# EAGLE board main_tugas terakhir (EAGLE 9.6.2)
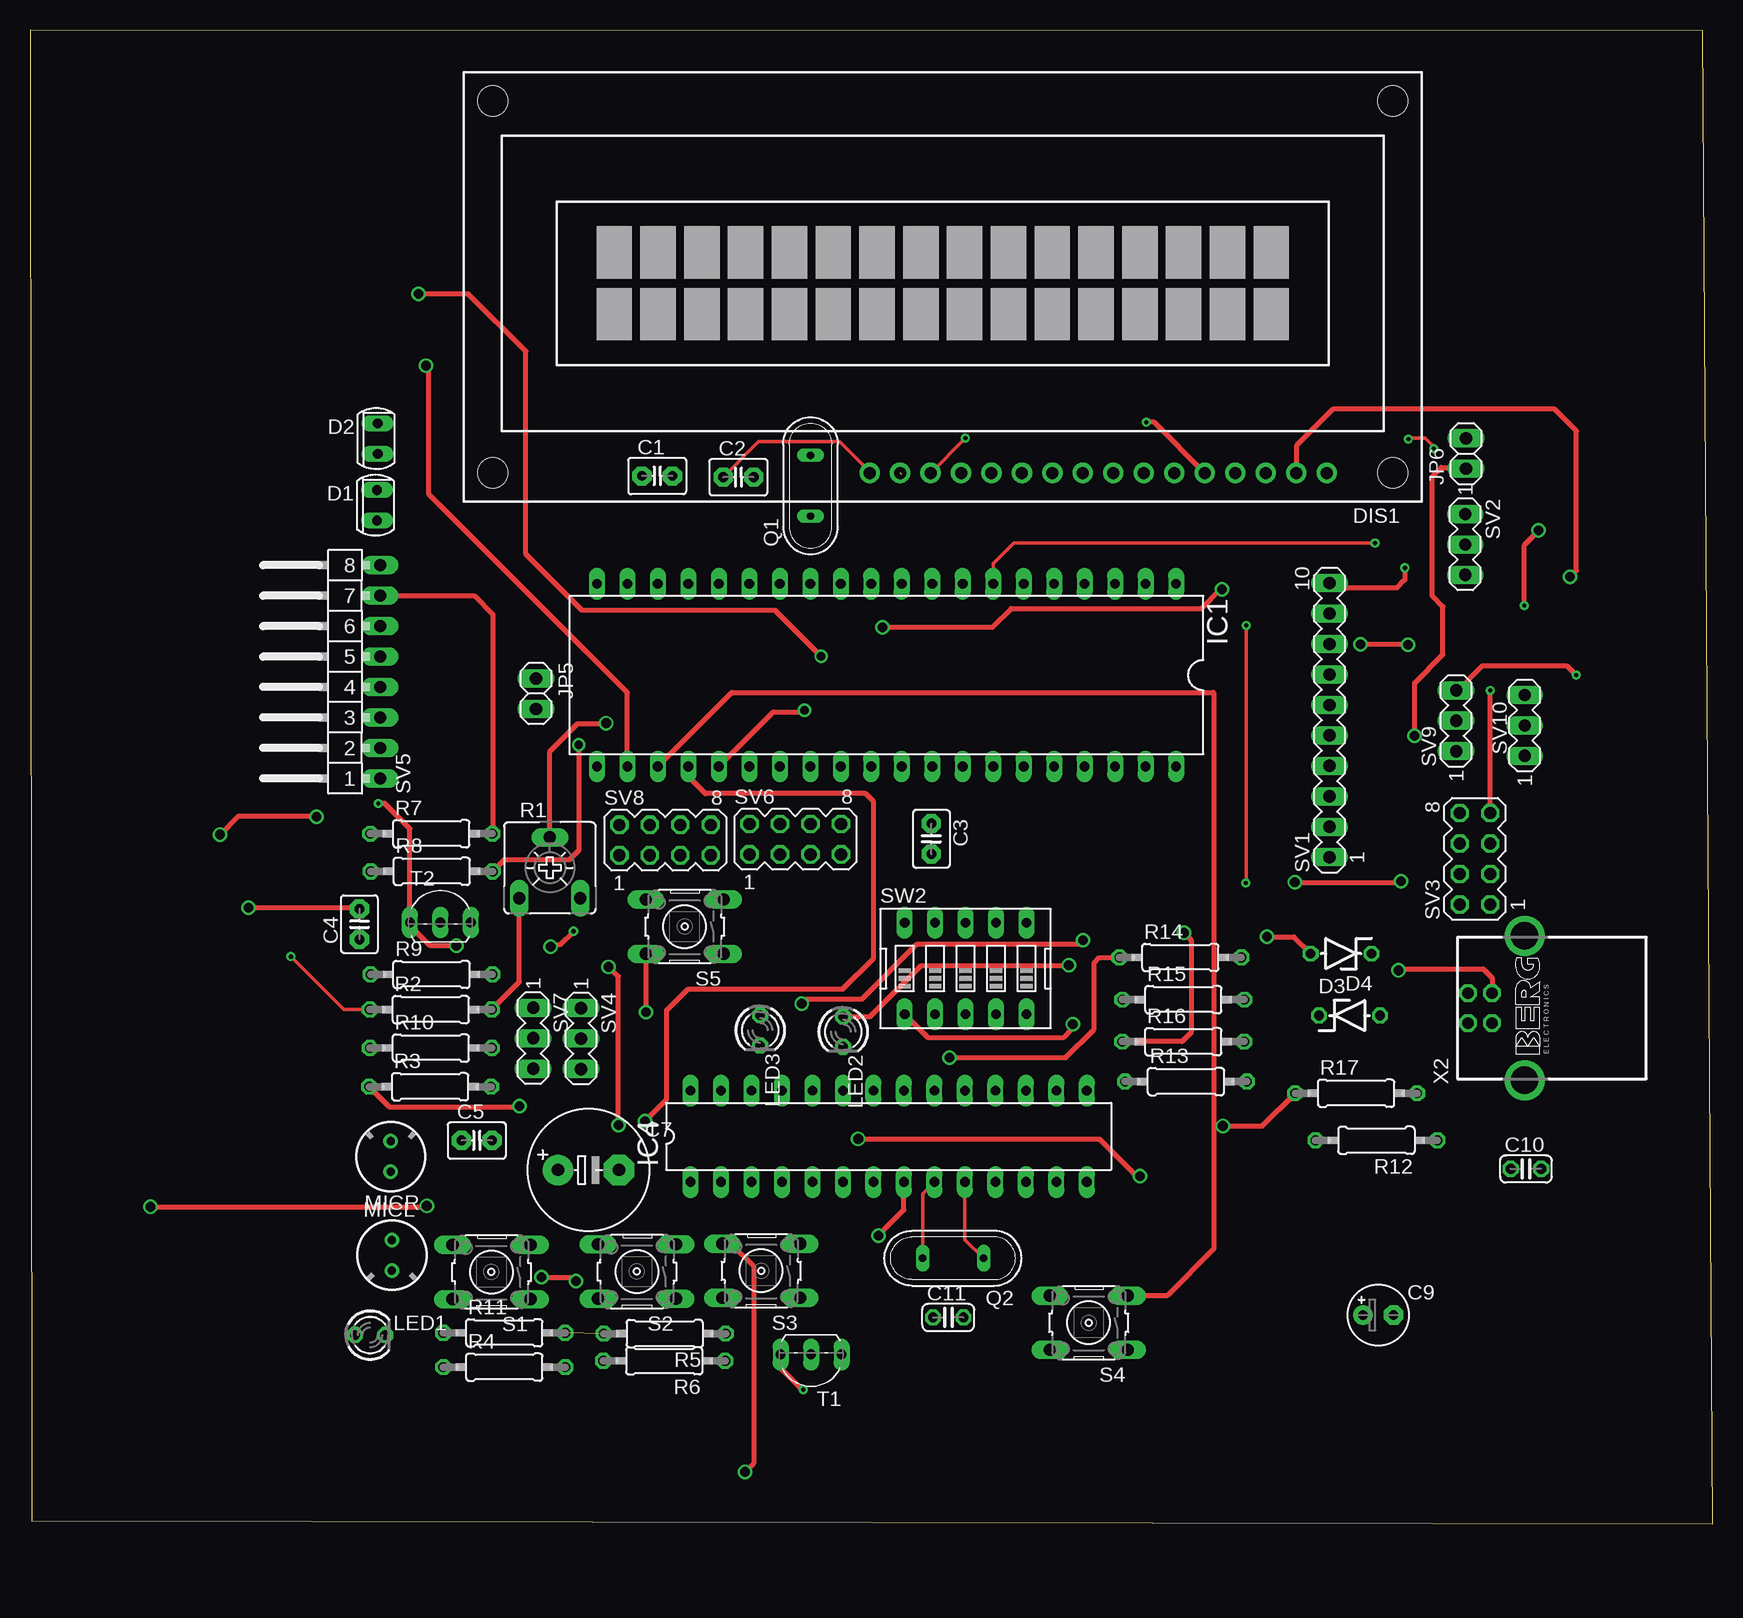
[diagram p0: board, top side]
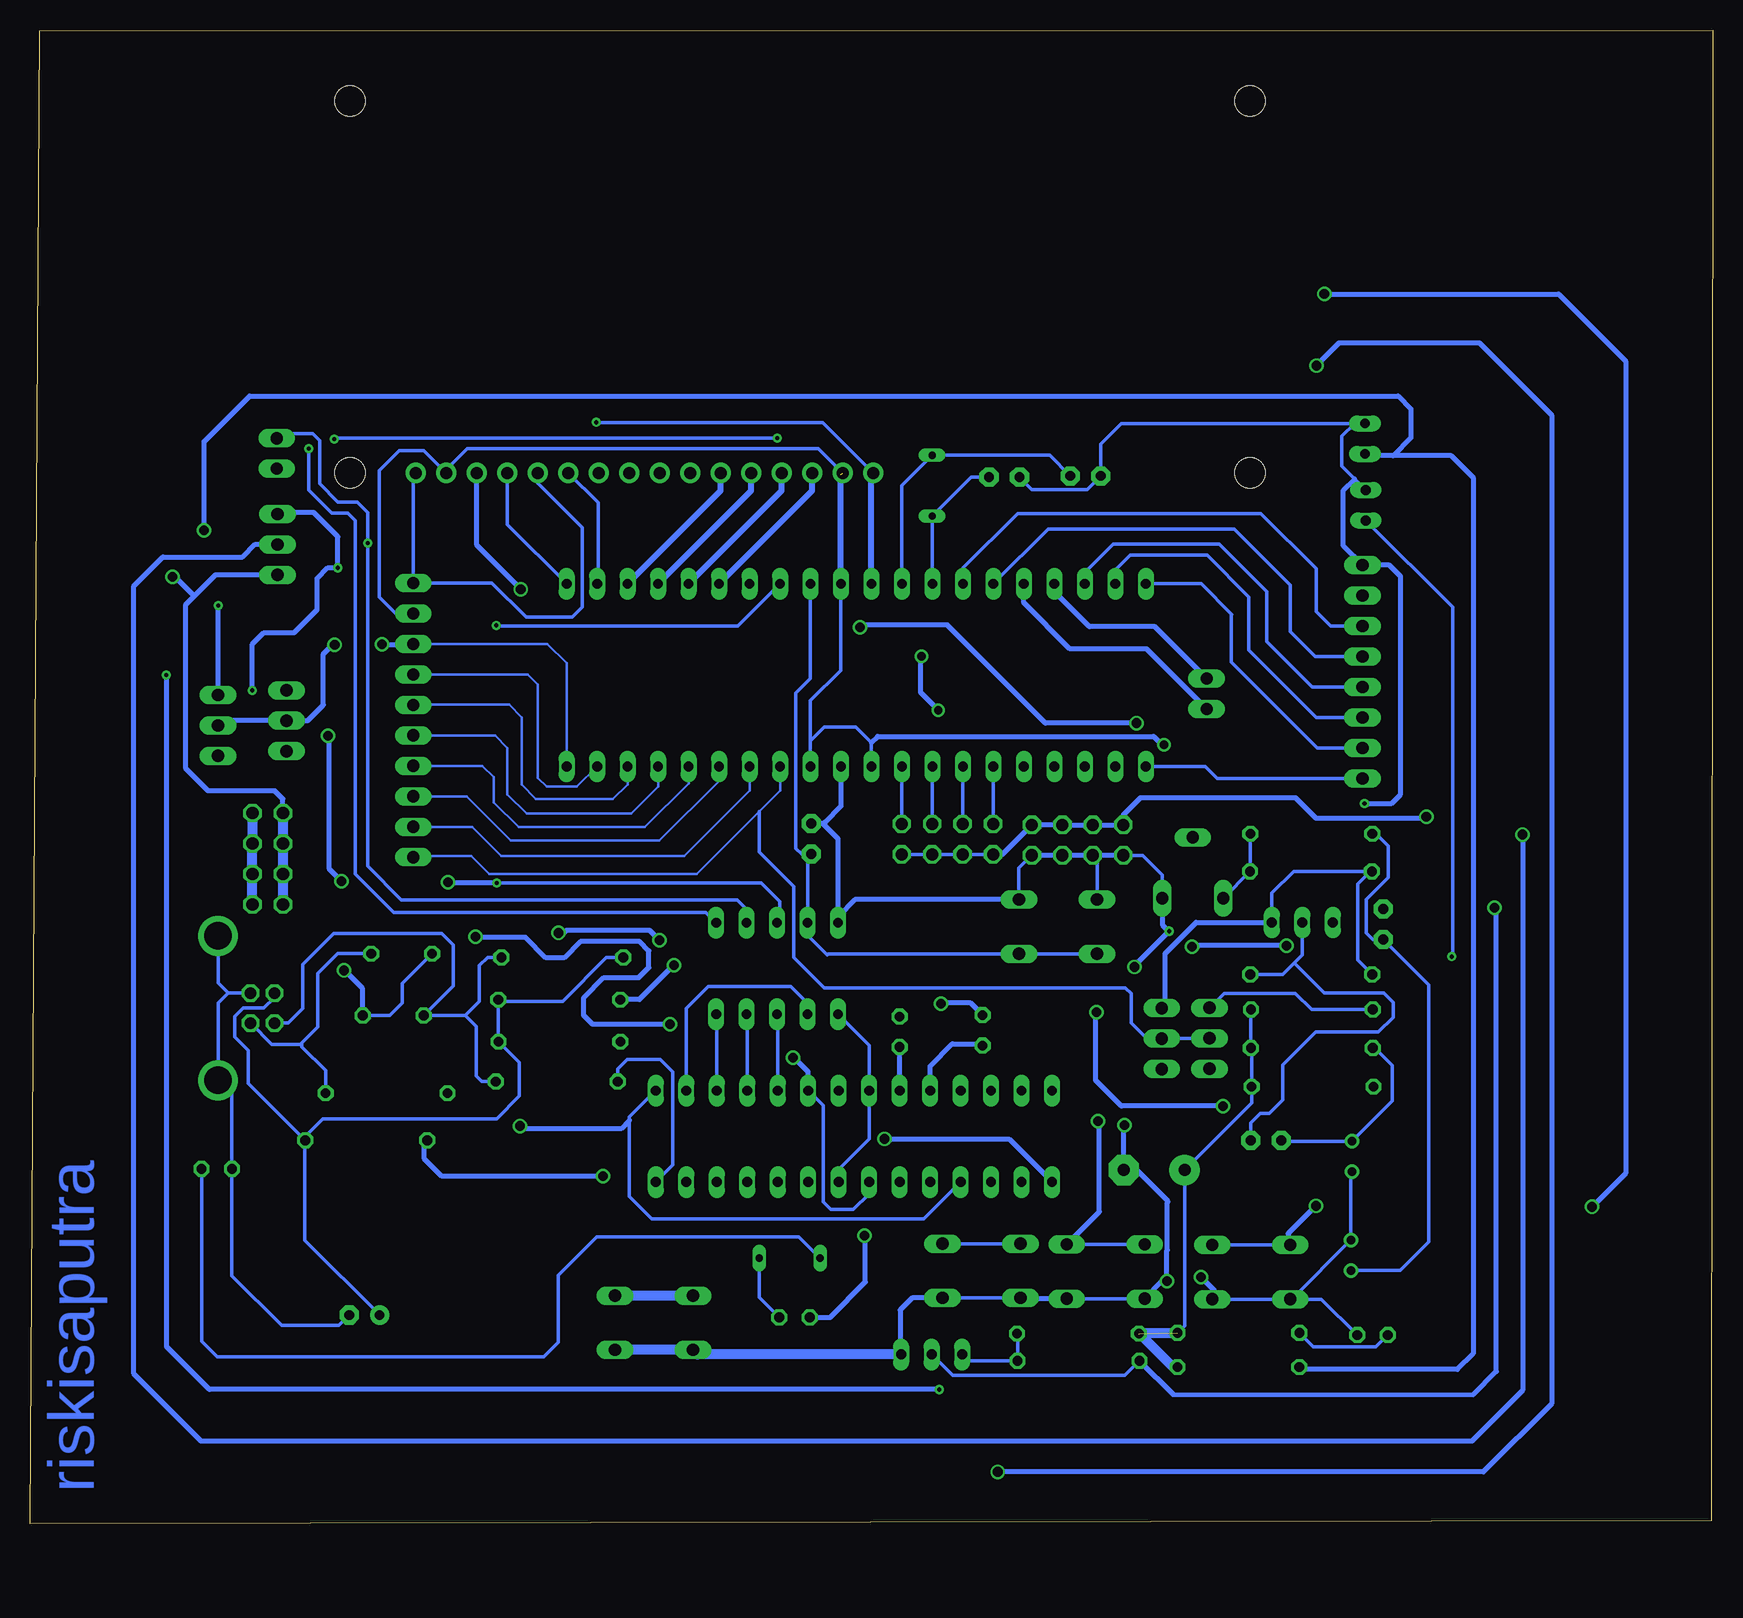
[diagram p1: board, bottom side, seen from below]

Size 140.22 x 124.52 mm. Coordinates in mm from the lower left corner, seen from the top.
Outline: 0.13,0.24 140.22,0 139.4,124.48 0,124.52 0.13,0.24
Copper layers (1*16): Top 0.035mm / dielectric 1.5mm / Bottom 0.035mm
Design rules "default": minimum track width 6mil, minimum drill 0.35mm, track to track 6mil, track to pad 6mil, pad to pad 6mil, via to via 6mil, smd to smd 6mil, copper to edge 40mil, drill to drill 6mil, minimum pad ring 10mil, minimum via ring 8mil, stop-mask expansion 4mil, vias tented up to drill 0mil, thermal gap 10mil

## Footprints (pad centres in the part's own frame; a part is rotated, then mirrored left to right if it is on the bottom)
C2.5-3 = drill 0.813 pad 1.6 octagon: 1 -1.27,0; 2 1.27,0
E5-10,5 = drill 1.016 pad 2.54: + -2.54,0 | drill 1.016 pad 2.54 octagon: - 2.54,0
E2,5-5 = drill 0.813 pad 1.6: + -1.27,0 | drill 0.813 pad 1.6 octagon: - 1.27,0
C025-024X044 = drill 0.813 octagon: 1 -1.27,0; 2 1.27,0
SFH225 = drill 0.813 long: A 0,1.27; K 0,-1.27
ZDIO-5 = drill 0.813 octagon: A 2.54,0; C -2.54,0
TUXGR_16X2_R2 = drill 1 pad 1.676: 1 -32,15.5; 2 -29.46,15.5; 3 -26.92,15.5; 4 -24.38,15.5; 5 -21.84,15.5; 6 -19.3,15.5; 7 -16.76,15.5; 8 -14.22,15.5; 9 -11.68,15.5; 10 -9.14,15.5; 11 -6.6,15.5; 12 -4.06,15.5; 13 -1.52,15.5; 14 1.02,15.5; 15 3.56,15.5; 16 6.1,15.5 | hole 2.5: -37.5,-15.5; 37.5,-15.5; -37.5,15.5; 37.5,15.5
DIL40 = drill 0.813 long: 1 -24.13,-7.62; 2 -21.59,-7.62; 3 -19.05,-7.62; 4 -16.51,-7.62; 5 -13.97,-7.62; 6 -11.43,-7.62; 7 -8.89,-7.62; 8 -6.35,-7.62; 9 -3.81,-7.62; 10 -1.27,-7.62; 11 1.27,-7.62; 12 3.81,-7.62; 13 6.35,-7.62; 14 8.89,-7.62; 15 11.43,-7.62; 16 13.97,-7.62; 17 16.51,-7.62; 18 19.05,-7.62; 19 21.59,-7.62; 20 24.13,-7.62; 21 24.13,7.62; 22 21.59,7.62; 23 19.05,7.62; 24 16.51,7.62; 25 13.97,7.62; 26 11.43,7.62; 27 8.89,7.62; 28 6.35,7.62; 29 3.81,7.62; 30 1.27,7.62; 31 -1.27,7.62; 32 -3.81,7.62; 33 -6.35,7.62; 34 -8.89,7.62; 35 -11.43,7.62; 36 -13.97,7.62; 37 -16.51,7.62; 38 -19.05,7.62; 39 -21.59,7.62; 40 -24.13,7.62
DIL28-3 = drill 0.813 long: 1 -16.51,-3.81; 2 -13.97,-3.81; 3 -11.43,-3.81; 4 -8.89,-3.81; 5 -6.35,-3.81; 6 -3.81,-3.81; 7 -1.27,-3.81; 8 1.27,-3.81; 9 3.81,-3.81; 10 6.35,-3.81; 11 8.89,-3.81; 12 11.43,-3.81; 13 13.97,-3.81; 14 16.51,-3.81; 15 16.51,3.81; 16 13.97,3.81; 17 11.43,3.81; 18 8.89,3.81; 19 6.35,3.81; 20 3.81,3.81; 21 1.27,3.81; 22 -1.27,3.81; 23 -3.81,3.81; 24 -6.35,3.81; 25 -8.89,3.81; 26 -11.43,3.81; 27 -13.97,3.81; 28 -16.51,3.81
1X02 = drill 1.016 long: 1 -1.27,0; 2 1.27,0
LED3MM = drill 0.813 octagon: A -1.27,0; K 1.27,0
F6050AP = drill 0.7 pad 1.2: 1 0,1.27; 2 0,-1.27
QS = drill 0.61 long: 1 -2.54,0; 2 2.54,0
CA6V = drill 1.016 long: A -2.54,-2.54; E 2.54,-2.54; S 0,2.54
0207/10 = drill 0.813 octagon: 1 -5.08,0; 2 5.08,0
B3F-10XX = drill 1.016 long: 1 -3.251,2.261; 2 3.251,2.261; 3 -3.251,-2.261; 4 3.251,-2.261
MA10-1 = drill 1.016 long: 1 -11.43,0; 2 -8.89,0; 3 -6.35,0; 4 -3.81,0; 5 -1.27,0; 6 1.27,0; 7 3.81,0; 8 6.35,0; 9 8.89,0; 10 11.43,0
MA03-1 = drill 1.016 long: 1 -2.54,0; 2 0,0; 3 2.54,0
MA04-2 = drill 1.016 octagon: 1 -3.81,-1.27; 2 -3.81,1.27; 3 -1.27,-1.27; 4 -1.27,1.27; 5 1.27,-1.27; 6 1.27,1.27; 7 3.81,-1.27; 8 3.81,1.27
MA08-1W = drill 1.016 long: 1 -8.89,0; 2 -6.35,0; 3 -3.81,0; 4 -1.27,0; 5 1.27,0; 6 3.81,0; 7 6.35,0; 8 8.89,0
EDG-05 = drill 0.813 long: 1 -5.08,-3.81; 2 -2.54,-3.81; 3 0,-3.81; 4 2.54,-3.81; 5 5.08,-3.81; 6 5.08,3.81; 7 2.54,3.81; 8 0,3.81; 9 -2.54,3.81; 10 -5.08,3.81
TO92-EBC = drill 0.813 long: B 0,-1.27; C 2.54,-1.27; E -2.54,-1.27
PN61729-S = drill 0.95 octagon: 1 1.25,4.71; 2 -1.25,4.71; 3 -1.25,2.71; 4 1.25,2.71 | drill 2.3 pad 2.9: S1 -6.02,0; S2 6.02,0

## Placement (x,y rotation side)
C1  22p  [C2.5-3]  52.27,87.35 0 top
C2  22p  [C2.5-3]  59.03,87.25 0 top
C3  10nF  [C2.5-3]  75.12,57.1 270 top
C4  100nF  [C2.5-3]  27.45,49.99 90 top
C5  100nF  [C2.5-3]  37.23,31.96 0 top
C7  1000uF/16V  [E5-10,5]  46.54,29.5 0 top
C9  10uF/16V  [E2,5-5]  112.36,17.4 0 top
C10  22pF  [C025-024X044]  124.66,29.59 0 top
C11  22pF  [C025-024X044]  76.52,17.21 0 top
D1  SFH225  [SFH225]  28.91,84.9 180 top
D2  SFH225  [SFH225]  28.97,90.45 180 top
D3  DZ3,6V  [ZDIO-5]  109.96,42.37 0 top
D4  DZ3,6V  [ZDIO-5]  109.25,47.53 180 top
DIS1  TUXGR_16X2_R2  [TUXGR_16X2_R2]  76.06,103.1 180 top
IC1  MEGA16-P  [DIL40]  71.37,70.75 180 top
IC4  MEGA8-P  [DIL28-3]  71.56,32.3 0 top
JP5  [1X02]  42.17,69.2 270 top
JP6  [1X02]  119.66,89.22 90 top
LED1  merah  [LED3MM]  28.34,15.74 0 top
LED2  Merah  [LED3MM]  67.76,41.01 270 top
LED3  hijau  [LED3MM]  60.84,41.14 270 top
MICL  MC  [F6050AP]  30.15,22.38 0 top
MICR  MC  [F6050AP]  30.06,30.62 180 top
Q1  8MHz  [QS]  65.04,86.54 90 top
Q2  12MHz  [QS]  76.92,22.14 180 top
R1  20K  [CA6V]  43.32,54.69 0 top
R2  56K  [0207/10]  33.4,42.87 0 top
R3  10K  [0207/10]  33.34,36.44 0 top
R4  56K  [0207/10]  39.52,13.06 0 top
R5  10K  [0207/10]  52.89,15.85 180 top
R6  100K  [0207/10]  52.85,13.58 180 top
R7  10K  [0207/10]  33.44,57.53 0 top
R8  10K  [0207/10]  33.48,54.39 0 top
R9  100K  [0207/10]  33.46,45.79 0 top
R10  10K  [0207/10]  33.4,39.67 0 top
R11  330  [0207/10]  39.52,15.92 0 top
R12  10K  [0207/10]  112.2,31.96 180 top
R13  68  [0207/10]  96.33,36.87 0 top
R14  2K2  [0207/10]  95.86,47.21 0 top
R15  330  [0207/10]  96.11,43.7 0 top
R16  330  [0207/10]  96.11,40.19 0 top
R17  68  [0207/10]  110.51,35.89 0 top
S1  [B3F-10XX]  38.45,20.99 180 top
S2  [B3F-10XX]  50.58,21.03 180 top
S3  [B3F-10XX]  60.94,21.09 180 top
S4  [B3F-10XX]  88.23,16.76 180 top
S5  [B3F-10XX]  54.56,49.78 180 top
SV1  [MA10-1]  108.29,67 90 top
SV2  [MA03-1]  119.6,81.64 270 top
SV3  [MA04-2]  120.41,55.44 90 top
SV4  [MA03-1]  45.91,40.44 270 top
SV5  [MA08-1W]  29.18,71.02 90 top
SV6  [MA04-2]  63.78,57.07 0 top
SV7  [MA03-1]  41.92,40.48 270 top
SV8  [MA04-2]  52.92,57 0 top
SV9  [MA03-1]  118.84,66.94 90 top
SV10  [MA03-1]  124.56,66.56 90 top
SW2  [EDG-05]  77.97,46.29 0 top
T1  [TO92-EBC]  65.09,12.85 180 top
T2  [TO92-EBC]  34.2,51.4 0 top
X2  PN61729-S  [PN61729-S]  124.55,42.99 90 top

## Library data of the parts
C1-C5 = capacitor-wima
C7 C9-C11 R2-R11 = rcl
D1 D2 = opto-trans-siemens; OC_FARNELL: unknown; OC_NEWARK: unknown
D3 D4 = diode
DIS1 = display-lcd; OC_FARNELL: unknown; OC_NEWARK: unknown
IC1 = atmel; MPN: ATMEGA16-16PU; OC_FARNELL: 9171142; OC_NEWARK: 01M6885
IC4 = atmel
JP5 JP6 = pinhead
LED1-LED3 = led
MICL MICR = microphon
Q1 Q2 SW2 = special
R1 = pot
R12-R17 = resistor
S1-S5 = switch-omron; MPN: B3F-1000; OC_FARNELL: 176432; OC_NEWARK: 36M3542
SV1-SV10 = con-lstb; OC_FARNELL: unknown; OC_NEWARK: unknown
T1 T2 = transistor
X2 = con-berg

## Nets
DGND: C9.- C10.1 C11.1 D3.A D4.A IC4.8 IC4.22 SW2.1 X2.4 X2.S1 X2.S2
GND: C1.1 C2.1 C3.1 C7.- D1.K D2.K DIS1.1 DIS1.5 DIS1.16 IC1.11 IC1.31 LED1.K MICL.1 MICR.1 R1.E S1.1 S1.2 S2.1 S2.2 S3.1 S3.2 S4.1 S4.2 S5.3 S5.4 SV1.10 SV2.1 SV3.1 SV3.3 SV3.5 SV3.7 SV5.8 SV8.1 SV8.3 SV8.5 SV8.7 SW2.10 T1.E T2.E
MISO: IC1.7 JP6.2 SW2.7
MOSI: DIS1.14 IC1.6 SW2.6
N$1: IC1.33 SV1.1 SV4.2 SV7.2
N$2: IC1.34 SV1.2
N$3: IC1.35 SV1.3
N$4: IC1.36 SV1.4
N$5: IC1.37 SV1.5
N$6: IC1.38 SV1.6
N$7: IC1.39 SV1.7
N$8: D2.A R4.1 SV10.3
N$9: IC1.24 S2.3 S2.4
N$10: DIS1.13 IC1.5
N$11: DIS1.12 IC1.4
N$12: DIS1.11 IC1.3
N$13: DIS1.6 IC1.2
N$14: R5.1 R6.1 SV9.3 T1.C
N$15: DIS1.3 R1.S
N$16: C1.2 IC1.12 Q1.2
N$17: C2.2 IC1.13 Q1.1
N$18: DIS1.4 IC1.1
N$19: D1.A R2.1 SV7.1
N$20: IC1.23 S4.3 S4.4
N$21: IC1.40 SV1.8 SV9.2 SV10.2
N$22: C4.2 R6.2 T1.B
N$23: C4.1 MICL.2 R7.1
N$24: R8.1 R9.1 SV4.1 T2.C
N$25: C5.2 R9.2 T2.B
N$26: C5.1 MICR.2 R10.1
N$27: IC1.22 S3.3 S3.4
N$28: IC1.25 S1.3 S1.4
N$30: IC1.21 SV5.1
N$32: IC1.20 SV5.2
N$33: IC1.19 SV5.3
N$34: IC1.18 SV5.4
N$35: IC1.15 SV5.5
N$36: IC1.14 SV5.6
N$37: IC1.16 JP5.2
N$38: IC1.17 JP5.1
N$41: LED1.A R11.1
N$42: IC4.1 R12.2
N$44: IC1.26 SV6.2
N$45: IC1.27 SV6.4
N$46: IC1.28 SV6.6
N$47: IC1.29 SV6.8
N$51: C10.2 IC4.9 Q2.2
N$52: C11.2 IC4.10 Q2.1
N$53: IC4.14 R13.1
N$55: LED2.A R15.1
N$56: LED3.A R16.1
N$57: IC4.23 LED2.K
N$58: IC4.24 LED3.K
N$59: D4.C R17.2 X2.3
N$67: IC4.4 IC4.15 R17.1
N$69: D3.C R13.2 R14.2 X2.2
N$175: IC4.17 SW2.5
N$176: IC4.18 SW2.4
N$177: IC4.19 SW2.3
N$178: IC4.16 SW2.2
RESET: C3.2 IC1.9 R3.1 S5.1 S5.2 SW2.9
SCK: IC1.8 JP6.1 SW2.8
VCC: C7.+ DIS1.2 DIS1.15 IC1.10 IC1.30 IC1.32 R1.A R2.2 R3.2 R4.2 R5.2 R7.2 R8.2 R10.2 R11.2 SV1.9 SV2.3 SV3.2 SV3.4 SV3.6 SV3.8 SV5.7
VDD: SV2.2 SV6.1 SV6.3 SV6.5 SV6.7 SV8.2 SV8.4 SV8.6 SV8.8
VPP: C9.+ IC4.7 IC4.20 R12.1 R14.1 R15.2 R16.2 X2.1

## Tracks (layer width: path | path; a pad name or v marks a point on that pad's centre or on a via)
DGND  (via drill 0.8)
  Top 0.406: v114.05,46.13 114.18,46.26 121.09,46.26 121.84,45.5 X2.4 | v70.7,24.03 72.83,26.16 IC4.8 | SW2.1 74.8,40.56 86.18,40.56 86.85,41.23 86.85,41.59 v86.9,41.64 | v103.09,48.93 105.32,48.93 D4.A
  Bottom 0.305: IC4.8 72.83,29.53 70.29,32.07 IC4.22 70.29,39.88 SW2.1 | D4.A 109.19,45.05 109.19,43.42 110.23,42.37 D3.A | C9.- 114.5,16.53 119.24,16.53 123.39,20.68 C10.1 123.39,35.81 X2.S1 124.55,43.4 123.71,44.24 | X2.4 123.71,44.24 | 123.71,44.24 124.55,45.09 X2.S2
  Bottom 0.406: D3.A 112.5,44.62 114,46.13 v114.05,46.13 | C11.1 73.55,17.21 70.61,20.15 70.61,23.91 70.7,24 v70.7,24.03 | v86.9,41.64 93.34,41.64 94.1,42.4 94.1,43.83 92.4,45.53 89.49,45.53 88.64,46.38 88.64,47.76 89.4,48.52 94.37,48.52 95.71,47.18 97.23,47.18 98.93,48.88 103.09,48.88 v103.09,48.93
GND  (via drill 0.35, 0.8)
  Top 0.305: C2.1 60.71,90.2 67.49,90.2 69.96,87.72 DIS1.16
  Top 0.406: v45.29,49.4 44.2,48.3 43.58,48.3 v43.39,48.11 | v29.02,60.05 29.56,60.05 31.66,57.95 T2.E 31.66,49.89 33.32,48.22 35.49,48.22 v35.52,48.19 | SV1.10 108.69,78.02 113.9,78.02 114.58,78.7 v114.58,79.69 | SV3.7 121.69,69.43 121.66,69.45 v121.69,69.47 | DIS1.5 93.69,91.82 v93.02,91.82 | v49.03,33.24 49.03,45.64 48.25,46.42 v48.2,46.42 | v45.49,20.24 45.24,20.49 42.7,20.49 v42.63,20.55
  Bottom 0.305: DIS1.5 97.9,86.76 94.2,83.06 94.2,76.42 95.04,75.58 98.89,75.58 101.73,78.43 SV1.10 108.29,87.38 DIS1.1 | R1.E 45.86,54.1 47.49,55.73 SV8.1 | S3.2 58.09,18.83 S3.1 | S2.1 S2.2 | S1.1 41.55,18.73 S1.2 | LED1.K 32.6,18.73 S1.2 | S1.2 35.07,18.73 MICL.1 30.15,29.26 MICR.1 | SV8.7 57.81,54.65 S5.3 | S5.4 51.31,55.38 SV8.3 | C2.1 56.73,86.22 52.13,86.22 C1.1 51,90 49.28,91.72 29.84,91.72 | D1.K 29.83,87.1 30.91,88.18 30.91,90.65 29.84,91.72 | 29.84,91.72 D2.K | DIS1.16 74.17,91.81 v93.01,91.81 v93.02,91.82
  Bottom 0.406: SV8.1 SV8.3 SV8.5 SV8.7 | R1.E 45.86,49.92 45.32,49.37 | 45.32,49.37 v45.29,49.4 | v29.02,60.05 26.76,60.05 26,60.81 26,78.97 26.94,79.91 SV5.8 30.77,81.5 30.77,86.16 29.83,87.1 | SV2.1 119.47,84.31 116.59,84.31 114.58,82.29 v114.58,79.69 115.4,79.69 116.29,78.8 116.29,76.21 118.21,74.29 120.74,74.29 121.69,73.34 v121.69,69.47 | v35.52,48.19 43.41,48.19 43.44,48.16 v43.39,48.11 | v49.03,33.24 49.06,33.27 49.08,33.24 C7.- 48.01,29.5 45.38,26.86 45.45,26.79 45.45,22.82 45.49,22.78 v45.49,20.24 45.58,20.15 45.94,20.15 S2.2 | v48.2,46.42 48.2,46.49 45.32,49.37 | v42.63,20.55 41.55,19.47 41.55,18.73 | S2.1 58.03,18.77 58.09,18.83 | S3.1 66.71,18.83 67.72,17.82 67.72,14.21 T1.E | S5.3 71.48,52.04 72.89,50.63 SW2.10 72.89,57.1 74,58.22 | C3.1 74.15,58.37 74,58.22 | IC1.31 72.64,59.83 74,58.48 74,58.22
  Bottom 0.508: IC1.11 70.1,87.46 DIS1.16
  Bottom 0.813: SV3.1 SV3.3 SV3.5 SV3.7 | T1.E 84.59,14.12 S4.2 S4.1
MISO  (via drill 0.35)
  Top 0.305: IC1.7 80.26,80.05 81.98,81.77 111.82,81.77 111.87,81.73 112.05,81.73 v112.08,81.76
  Bottom 0.305: JP6.2 119.27,90.88 116.68,90.88 116.1,90.3 116.1,86.71 114.57,85.18 112.96,85.18 112.08,84.31 v112.08,81.76 112.08,54.82 109.29,52.02 81.29,52.02 80.51,51.23 SW2.7
MOSI  (via drill 0.35)
  Top 0.305: DIS1.14 v77.95,90.51 | 83.1,50.04 SW2.6 | v116.99,89.63 116.99,89.7 117.02,89.74 116.26,90.51 114.87,90.51 v114.87,90.41
  Bottom 0.305: v116.99,89.63 116.99,86.16 115.08,84.26 113.74,84.26 113.11,83.63 113.11,54.15 109.92,50.96 83.91,50.96 SW2.6 | v77.95,90.51 114.82,90.51 114.9,90.44 v114.87,90.41
  Bottom 0.508: IC1.6 75.04,86.13 DIS1.14
N$1
  Bottom 0.2: IC1.33 77.72,61.12 79.46,59.39 84.66,54.19 101.97,54.19 103.45,55.66 108.19,55.66 SV1.1
  Bottom 0.305: 79.46,59.39 79.46,56.01 76.57,53.12 76.57,47.23 74.03,44.69 48.96,44.69 48.47,44.2 48.47,41.76 47.15,40.44 SV4.2 41.96,40.44 SV7.2 41.99,40.41
N$2
  Bottom 0.2: IC1.34 80.26,61.14 85.72,55.68 100.96,55.68 103.38,58.11 SV1.2
N$3
  Bottom 0.2: IC1.35 82.8,61.94 87.78,56.96 100.15,56.96 103.83,60.65 SV1.3
N$4
  Bottom 0.2: IC1.36 85.34,61.73 89,58.07 99.5,58.07 101.58,60.14 101.58,62.23 102.53,63.19 SV1.4
N$5
  Bottom 0.2: IC1.37 87.88,61.46 90.14,59.21 98.83,59.21 100.44,60.81 100.44,64.69 101.47,65.73 SV1.5
N$6
  Bottom 0.2: IC1.38 90.42,61.62 91.64,60.4 98.06,60.4 99.26,61.61 99.26,67.23 100.31,68.27 SV1.6
N$7
  Bottom 0.2: IC1.39 94.64,61.45 97.18,61.45 97.9,62.17 97.9,69.96 98.75,70.81 SV1.7
N$8  (via drill 0.35, 0.8)
  Top 0.406: v124.53,76.55 124.53,81.58 124.59,81.64 124.59,81.68 v125.72,82.81
  Bottom 0.406: D2.A 28.83,89.04 26.64,89.04 | R4.1 34.24,12.86 21.28,12.86 19.96,14.18 19.96,87.22 21.79,89.04 26.64,89.04 | SV10.3 124.56,76.44 124.6,76.48 | 124.6,76.48 | v125.72,82.81 125.72,90.22 121.92,94.01 26.22,94.01 25.15,92.94 25.15,90.52 26.64,89.04 | v124.53,76.55 124.6,76.48
N$9  (via drill 0.8)
  Top 0.406: v51.24,33.56 53.06,35.37 53.06,42.8 54.84,44.58 67.75,44.58 70.31,47.15 70.31,60.2 69.64,60.86 56.28,60.86 54.86,62.28 IC1.24
  Bottom 0.305: S2.4 S2.3
  Bottom 0.406: S2.3 51.11,26.01 51.11,33.43 v51.24,33.56
N$10
  Bottom 0.508: IC1.5 77.58,86.13 DIS1.13
N$11
  Bottom 0.508: IC1.4 80.12,86.13 DIS1.12
N$12
  Bottom 0.508: IC1.3 82.66,86.13 DIS1.11
N$13
  Bottom 0.305: IC1.2 92.88,78.45 92.88,85.12 DIS1.6
N$14  (via drill 0.35)
  Top 0.406: T1.C 62.55,12.96 64.31,11.19 v64.44,11.19 | v128.86,70.75 128.12,71.49 120.98,71.49 118.96,69.48 SV9.3
  Bottom 0.305: T1.C 62.01,13.58 R6.1 57.93,15.81 R5.1
  Bottom 0.406: v64.44,11.19 125.27,11.19 128.85,14.77 128.85,70.74 v128.86,70.75
N$15  (via drill 0.8)
  Top 0.406: R1.S 43.32,64.39 45.63,66.69 47.96,66.69 v48.02,66.75 | v71.06,74.75 80.2,74.75 81.76,76.3 97.63,76.3 99.24,77.91 v99.33,77.91
  Bottom 0.406: v48.02,66.75 55.61,66.75 63.79,74.93 71.06,74.93 v71.06,74.75 | v99.33,77.91 102.98,81.57 DIS1.3
N$16
  Bottom 0.305: IC1.12 67.56,86.55 Q1.2 55.26,89.08 C1.2
N$17
  Bottom 0.305: IC1.13 65.02,83.98 Q1.1 61.78,87.25 C2.2
N$18
  Bottom 0.305: IC1.1 100.44,83.31 100.44,84.73 100.44,84.87 DIS1.4
N$19  (via drill 0.35)
  Top 0.305: v21.74,47.28 26.15,42.87 R2.1
  Bottom 0.305: R2.1 33.42,42.87 34.78,44.23 40.71,44.23 SV7.1 | D1.A 21.68,76.4 21.68,47.34 v21.74,47.28
N$20
  Top 0.406: IC1.23 58.49,69.3 98.63,69.3 98.63,22.9 94.75,19.02 S4.3
  Bottom 0.813: S4.4 S4.3
N$21  (via drill 0.8)
  Top 0.406: v114.83,73.29 111.18,73.29 111.15,73.31 v110.89,73.31
  Bottom 0.2: IC1.40 95.5,71.74 97.11,73.35 108.15,73.35 SV1.8
  Bottom 0.406: SV10.2 124.17,66.94 SV9.2 117.1,66.94 115.77,68.27 115.77,72.51 114.91,73.37 v114.83,73.29 | v110.89,73.31 108.18,73.31 108.15,73.35
N$22  (via drill 0.8)
  Top 0.406: v18.2,51.36 27.34,51.36 C4.2
  Bottom 0.305: R6.2 48.99,12.36 63.33,12.36 T1.B
  Bottom 0.406: R6.2 44.97,10.79 19.96,10.76 18.02,12.7 18.02,50.97 18.31,51.25 v18.2,51.36
N$23
  Bottom 0.305: R7.1 28.07,57.53 27.03,56.48 27.03,53.89 28.89,52.03 28.89,49.25 28.35,48.72 C4.1 23.66,44.92 23.66,23.5 26.05,21.11 MICL.2
N$24
  Bottom 0.305: R8.1 28.54,54.39 | 28.54,54.39 34.92,54.39 36.74,52.57 T2.C | R9.1 29.57,46.98 29.57,53.36 28.54,54.39
  Bottom 0.406: SV4.1 45.64,43.26 45.64,47.54 43.05,50.13 T2.C
N$25
  Bottom 0.305: R9.2 35.82,45.79 34.88,46.74 | T2.B 34.2,47.42 34.88,46.74 | 34.88,46.74 32.38,44.24 27.4,44.24 26.62,43.47 26.62,42.23 27.86,40.99 33.08,40.99 35.83,38.24 35.83,35.34 36.95,34.22 37.72,34.22 38.5,33.44 C5.2
N$26
  Bottom 0.305: C5.1 35.89,31.89 MICR.2 26.7,35.25 26.7,38.2 28.16,39.66 R10.1
N$27  (via drill 0.8)
  Top 0.406: IC1.22 49.78,69.3 33.24,85.84 33.24,96.32 v33.02,96.55 | v59.58,4.33 60.34,5.09 60.34,21.42 58.41,23.35 S3.4
  Bottom 0.305: S3.4 S3.3
  Bottom 0.406: v33.02,96.55 31.12,98.44 19.43,98.44 13.42,92.42 13.42,10.02 19.1,4.33 v59.58,4.33
N$28  (via drill 0.7, 0.8)
  Top 0.406: IC1.25 61.95,67.67 64.54,67.67 v64.54,67.83 | v65.93,72.31 62.11,76.14 46.01,76.14 41.33,80.82 41.33,97.73 36.54,102.52 v32.37,102.52 | v10.05,26.42 32.82,26.42 32.96,26.56 33.01,26.56 v33.06,26.5
  Bottom 0.305: S1.4 35.37,23.25 S1.3
  Bottom 0.406: v64.54,67.83 66.01,69.3 66.01,72.24 v65.93,72.31 | v32.37,102.52 12.83,102.52 7.25,96.94 7.25,29.22 v10.05,26.42 | v10.05,26.42 | v33.06,26.5 35.37,24.2 35.37,23.25
N$30
  Bottom 0.305: SV5.1 41.3,62.13 42.3,63.13 IC1.21
N$32
  Bottom 0.305: SV5.2 32.96,64.67 40.13,71.85 40.13,75.73 40.06,75.79 42.64,78.37 IC1.20
N$33
  Bottom 0.305: SV5.3 33.03,67.21 38.66,72.85 38.66,77.27 42.14,80.74 48.56,80.74 49.78,79.52 IC1.19
N$34
  Bottom 0.305: SV5.4 33.38,69.75 37.16,73.54 37.16,77.71 41.11,81.66 49.95,81.66 52.32,79.28 IC1.18
N$35
  Bottom 0.305: IC1.15 55.37,82.94 39.89,82.94 35.22,78.27 35.22,74.37 33.14,72.29 SV5.5
N$36
  Bottom 0.305: SV5.6 31.84,74.83 33.06,76.05 33.06,79.61 37.67,84.23 57.92,84.23 62.48,79.66 IC1.14
N$37
  Bottom 0.406: JP5.2 47.18,72.93 53.56,72.93 57.4,76.78 IC1.16
N$38
  Bottom 0.406: JP5.1 46.49,74.79 51.94,74.79 54.86,77.71 IC1.17
N$41
  Bottom 0.305: LED1.A 28.06,14.76 33.28,14.76 R11.1
N$42  (via drill 0.8)
  Top 0.406: v69.02,32.09 89.11,32.09 92.22,28.98 v92.49,28.98
  Bottom 0.406: IC4.1 58.59,32.03 69.02,32.03 v69.02,32.09 | v92.49,28.98 105.91,28.98 107.37,30.43 107.37,31.72 R12.2
N$44
  Bottom 0.305: SV6.2 59.97,63.1 IC1.26
N$45
  Bottom 0.305: SV6.4 62.51,63.1 IC1.27
N$46
  Bottom 0.305: SV6.6 65.05,63.1 IC1.28
N$47
  Bottom 0.305: SV6.8 67.59,63.1 IC1.29
N$51
  Top 0.305: Q2.2 74.38,27.5 IC4.9
  Bottom 0.305: C10.2 125.93,15.23 124.6,13.9 97.39,13.9 96.19,15.11 96.19,20.71 92.98,23.92 76.16,23.92 Q2.2
N$52
  Top 0.305: Q2.1 77.91,23.69 IC4.10
  Bottom 0.305: C11.2 79.46,18.88 Q2.1
N$53
  Bottom 0.305: IC4.14 86.66,29.9 86.66,37.68 87.69,38.71 90.46,38.71 91.25,37.93 R13.1
N$55  (via drill 0.8)
  Top 0.406: LED2.A 70.03,42.28 74.28,46.53 86.08,46.53 86.13,46.47 86.46,46.47 v86.56,46.58
  Bottom 0.406: v86.56,46.58 89.45,43.7 R15.1
N$56  (via drill 0.8)
  Top 0.406: v64.31,43.35 64.7,43.74 69.33,43.74 73.91,48.32 87.43,48.32 v87.76,48.64 | v96.17,49.25 96.76,48.66 96.76,40.94 96.01,40.19 R16.1
  Bottom 0.406: LED3.A 61.85,43.41 64.26,43.41 v64.31,43.35 | v87.76,48.64 88.59,49.48 95.53,49.48 95.75,49.25 v96.17,49.25
N$57
  Bottom 0.406: IC4.23 LED2.K
N$58
  Bottom 0.406: IC4.24 65.21,38.15 63.36,40 60.98,40 LED3.K
N$59
  Bottom 0.305: X2.3 120.08,39.98 117.69,39.98 117.58,40.09 | 117.58,40.09 116.24,41.43 116.24,45.88 114.6,47.53 111.95,47.53 | 111.95,47.53 D4.C | 111.88,47.6 111.95,47.53 | 117.58,40.09 117.58,39.77 115.59,37.78 R17.2
N$67  (via drill 0.8)
  Top 0.406: v99.4,33.17 102.7,33.17 R17.1
  Bottom 0.305: IC4.4 65.74,25.43 88.4,25.43 90.27,27.3 90.27,33.63 90.27,33.91 IC4.15
  Bottom 0.406: 90.27,33.63 90.97,32.93 99.17,32.93 v99.4,33.17
N$69
  Bottom 0.305: 106.92,42.37 D3.C | R13.2 102.56,36.86 103.04,37.35 103.04,41.48 103.93,42.37 | 103.93,42.37 D3.C | R14.2 102.09,47.21 102.77,46.53 102.77,43.54 103.93,42.37 | D3.C 104.94,44.85 104.94,48.25 105.91,49.22 114.92,49.22 117.5,46.64 117.5,42.97 118.72,41.74 X2.2
N$175
  Bottom 0.305: IC4.17 82.99,42.42 SW2.5
N$176
  Bottom 0.305: IC4.18 80.45,42.42 SW2.4
N$177
  Bottom 0.305: IC4.19 77.91,42.42 SW2.3
N$178
  Bottom 0.305: SW2.2 75.43,43.38 76.83,44.78 83.71,44.78 85.53,42.96 IC4.16
RESET  (via drill 0.8)
  Top 0.406: R3.1 29.93,34.77 40.79,34.77 v40.79,34.82 | S5.2 51.34,47.49 v51.34,42.65
  Bottom 0.305: IC1.9 75.18,70.45 76.4,69.24 76.4,56.3 75.92,55.82 75.13,55.82 | 75.13,55.82 C3.2 | S5.2 S5.1 73.7,47.52 73.8,47.43 75.43,49.06 SW2.9 75.43,55.52 75.13,55.82
  Bottom 0.406: v40.79,34.82 49.27,34.82 51.42,36.97 51.42,42.57 v51.34,42.65
SCK  (via drill 0.35, 0.8)
  Top 0.305: v101.36,74.9 101.36,73.88 101.34,73.86 101.34,53.44 v101.32,53.42
  Top 0.406: v105.4,53.47 114.28,53.47 114.31,53.5 v114.26,53.56 | v115.38,65.69 115.38,70.09 117.74,72.45 117.74,76.47 116.85,77.37 116.85,87.32 117.59,88.06 119.55,88.06 JP6.1
  Bottom 0.305: IC1.8 81.25,74.84 101.3,74.84 v101.36,74.9 | v101.32,53.42 79.29,53.42 77.76,51.89 77.76,50.3 SW2.8
  Bottom 0.406: v101.32,53.42 105.09,53.42 105.27,53.6 v105.4,53.47 | v114.26,53.56 115.28,54.58 115.28,65.59 v115.38,65.69
VCC  (via drill 0.7, 0.8)  (2 unrouted)
  Top 0.406: SV5.7 37.02,77.37 38.58,75.81 38.58,57.59 R7.2 | R2.2 40.78,45.17 R1.A | v45.73,64.94 45.73,56.12 44.95,55.34 39.51,55.34 R8.2 | v128.34,78.93 128.86,79.45 128.86,91.11 127.05,92.92 108.57,92.92 105.52,89.88 DIS1.2
  Bottom 0.305: IC1.10 72.64,71.15 75.18,68.61 75.18,65.27 | 75.18,65.27 IC1.32 | DIS1.15 74.54,89.64 103.78,89.64 105.52,87.9 DIS1.2 107.4,89.47 109.45,89.47 111.14,87.79 111.14,77.27 109.76,75.89 SV1.9 | IC1.30 70.1,65.12 71.41,66.43 74.02,66.43 75.18,65.27 | R8.2 38.52,54.42 | 38.52,54.42 R7.2 | R1.A 38.52,54.41 38.52,54.42 | R2.2 R10.2 38.42,39.61 R3.2 38.42,35.07 C7.+ 44,16.52 R11.2
  Bottom 0.406: SV3.8 119.15,60.43 119.81,61.1 125.38,61.1 127.23,62.95 127.23,76.65 126.55,77.33 | 126.55,77.33 124.76,79.12 119.63,79.12 SV2.3 | 70.1,65.12 69.59,65.64 46.59,65.64 45.84,64.89 45.78,64.89 v45.73,64.94 | 126.55,77.33 128.21,79 128.34,79 v128.34,78.93
  Bottom 0.508: IC1.10 72.64,87.46
  Bottom 0.813: SV3.8 SV3.6 SV3.4 SV3.2 | R4.2 44.97,13.06 47.77,15.86 47.71,15.92 R11.2
VDD  (via drill 0.8)
  Top 0.406: v23.87,58.95 17.33,58.95 v15.84,57.46
  Bottom 0.305: SV6.7 SV6.5 | SV6.5 64.44,55.8 | 64.96,55.89 SV6.5 | SV6.5 SV6.3 SV6.1
  Bottom 0.406: SV6.1 59.2,55.8 SV8.8 SV8.6 SV8.4 SV8.2 49.11,59.1 47.68,60.53 34.79,60.53 33.08,58.82 23.87,58.82 v23.87,58.95 | v15.84,57.46 15.84,11.13 20.08,6.9 125.96,6.9 131.57,12.51 131.57,78.17 129.16,80.59 122.51,80.59 121.43,81.67 119.63,81.67 SV2.2
VPP  (via drill 0.8)
  Top 0.406: v76.64,38.86 86.32,38.86 88.67,41.21 88.67,46.77 89.12,47.21 R14.1
  Bottom 0.305: IC4.20 74.13,34.88 74.13,26.84 73.49,26.19 71.61,26.19 70.29,27.51 IC4.7 | R14.1 92.19,47.21 95.84,43.56 101.06,43.56 R15.2 101.19,40.2 R16.2 99.44,38.44 99.44,35.66 101.34,33.76 115.83,33.76 117.28,32.31 R12.1 | R12.1 122.03,36.71 122.03,39.44 123.16,40.57 123.16,42.28 122.46,42.98 120.75,42.98 119.84,43.89 X2.1 | C9.+ 117.31,23.63 117.31,31.93 R12.1
  Bottom 0.406: IC4.20 75.37,37.67 76.56,38.86 v76.64,38.86

## Text on the board
Bottom: riskisaputra